# Altium PCB indicator.PcbDoc
Units mm, origin at the board's own origin, x right, y up, seen from the top; angles counter-clockwise.
Board outline 50.93 x 30.86 mm, 2 copper layers (Top Layer, Bottom Layer); 13 components, 10 nets, 28 pads, 0 vias.
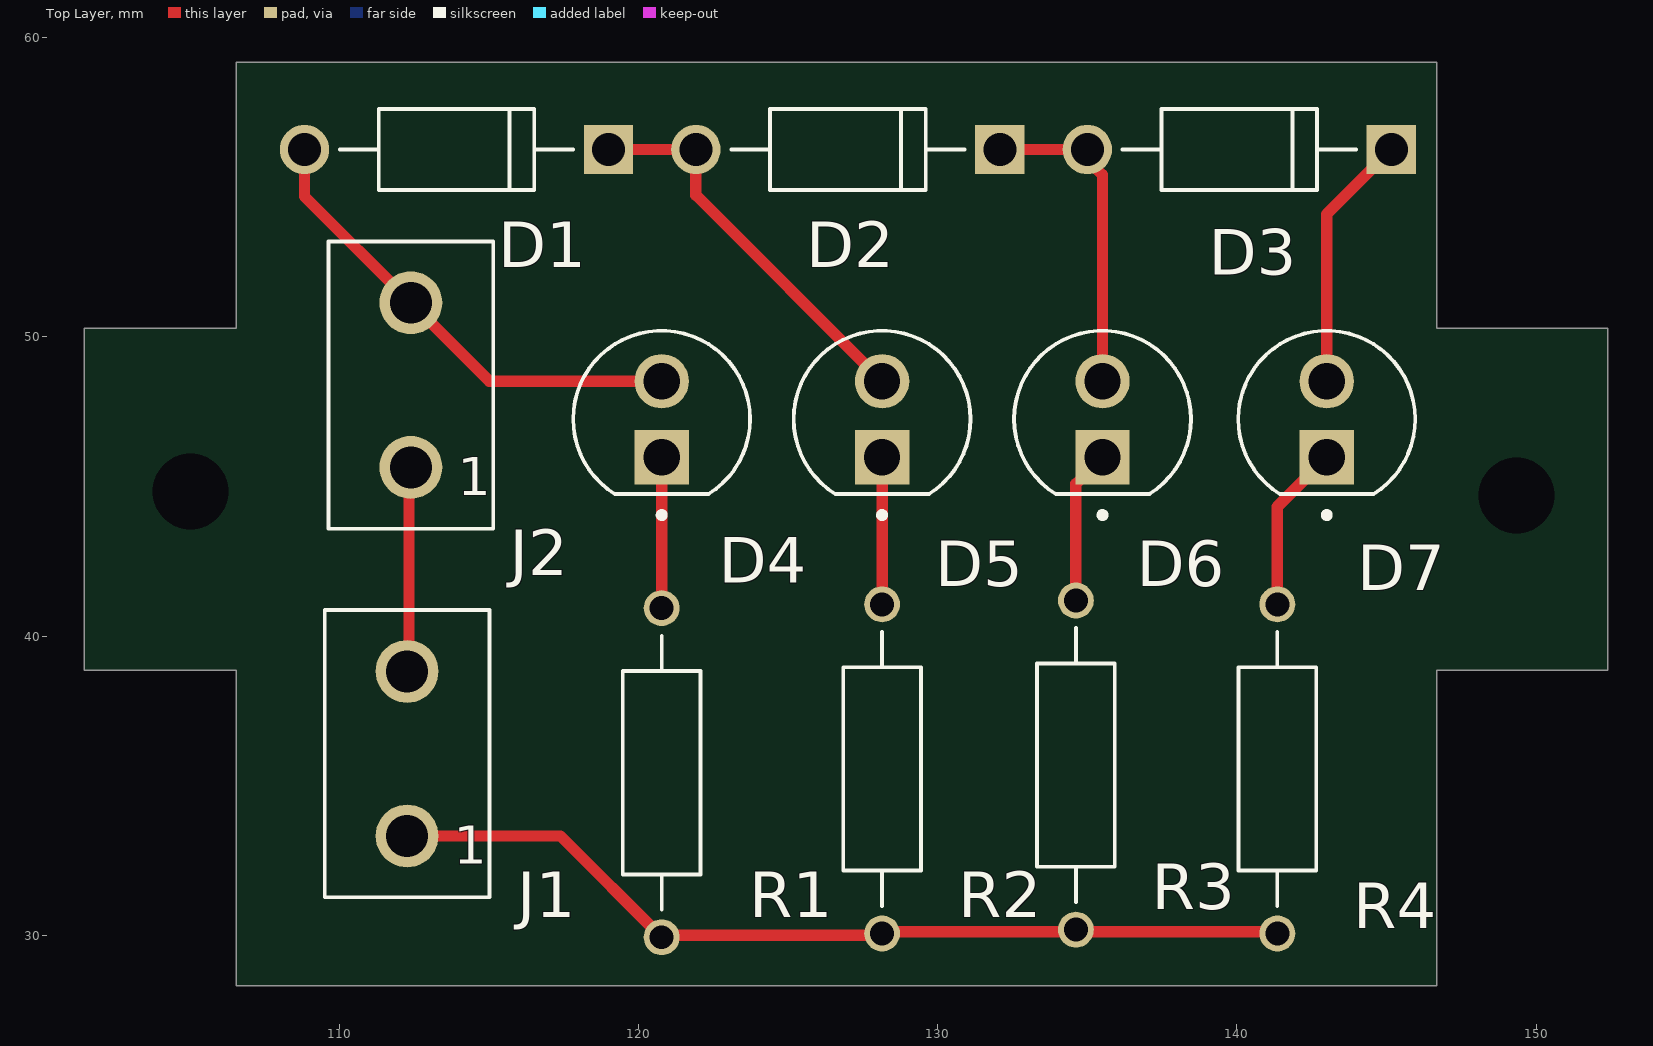
[diagram p0: Top Layer view]
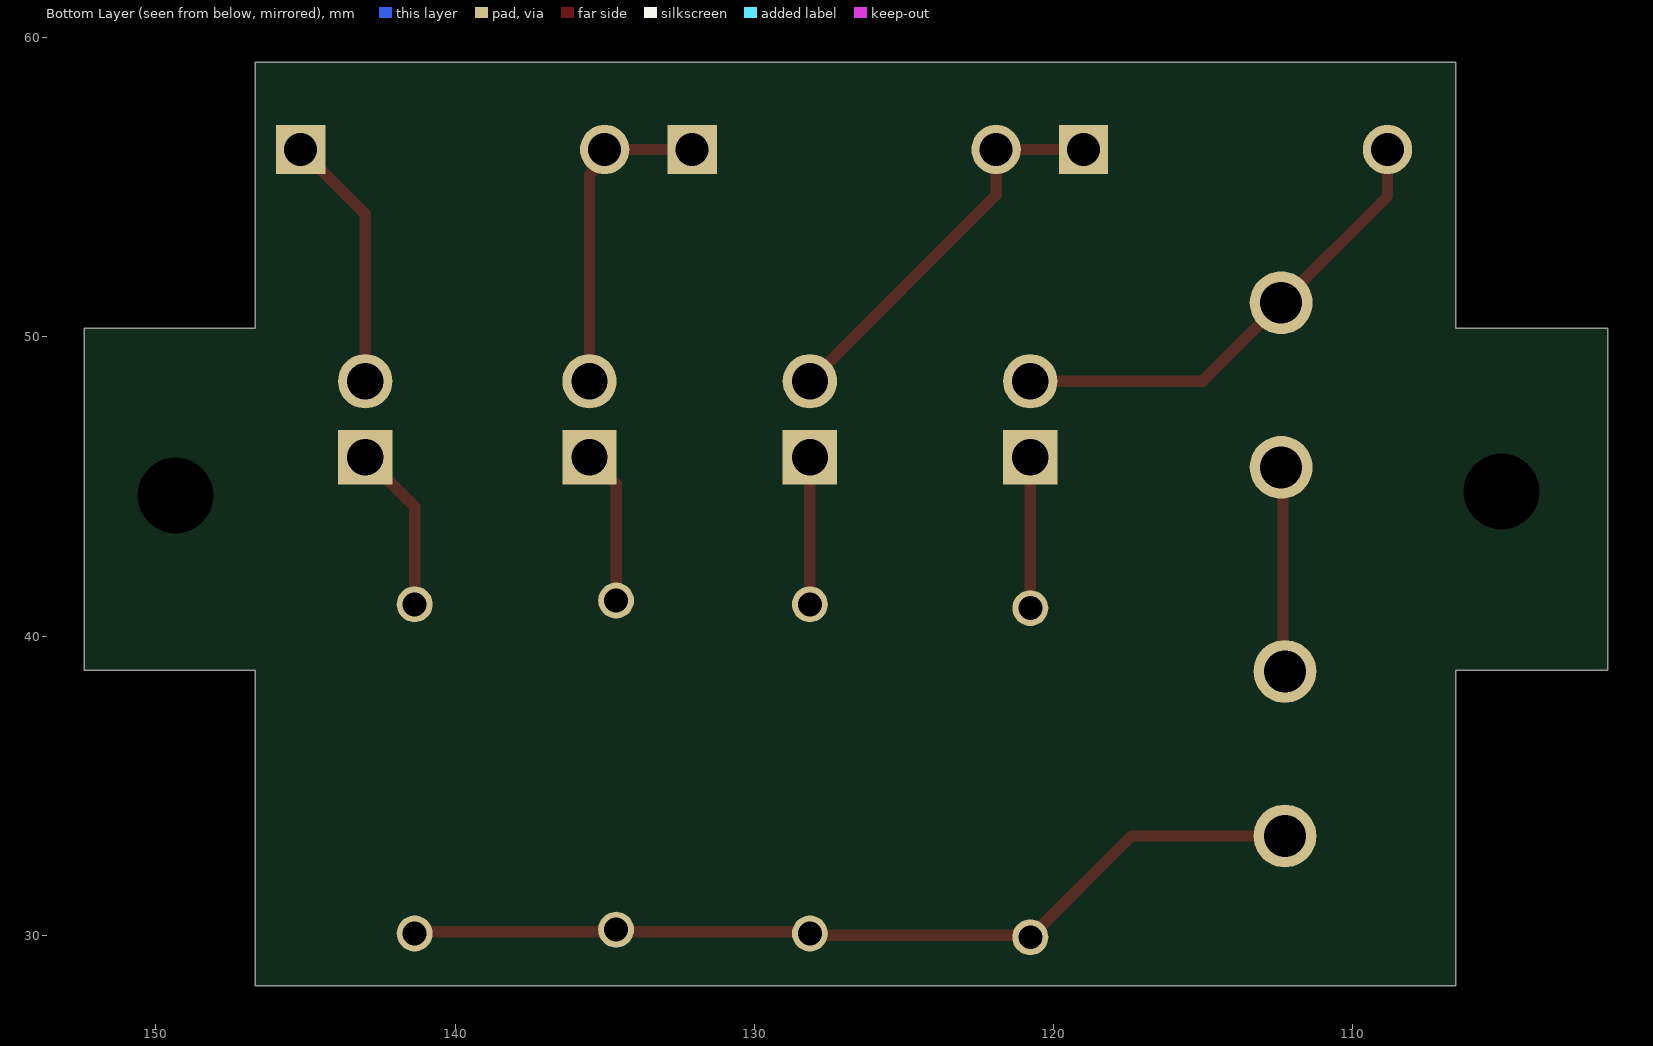
[diagram p1: Bottom Layer view, seen from below]
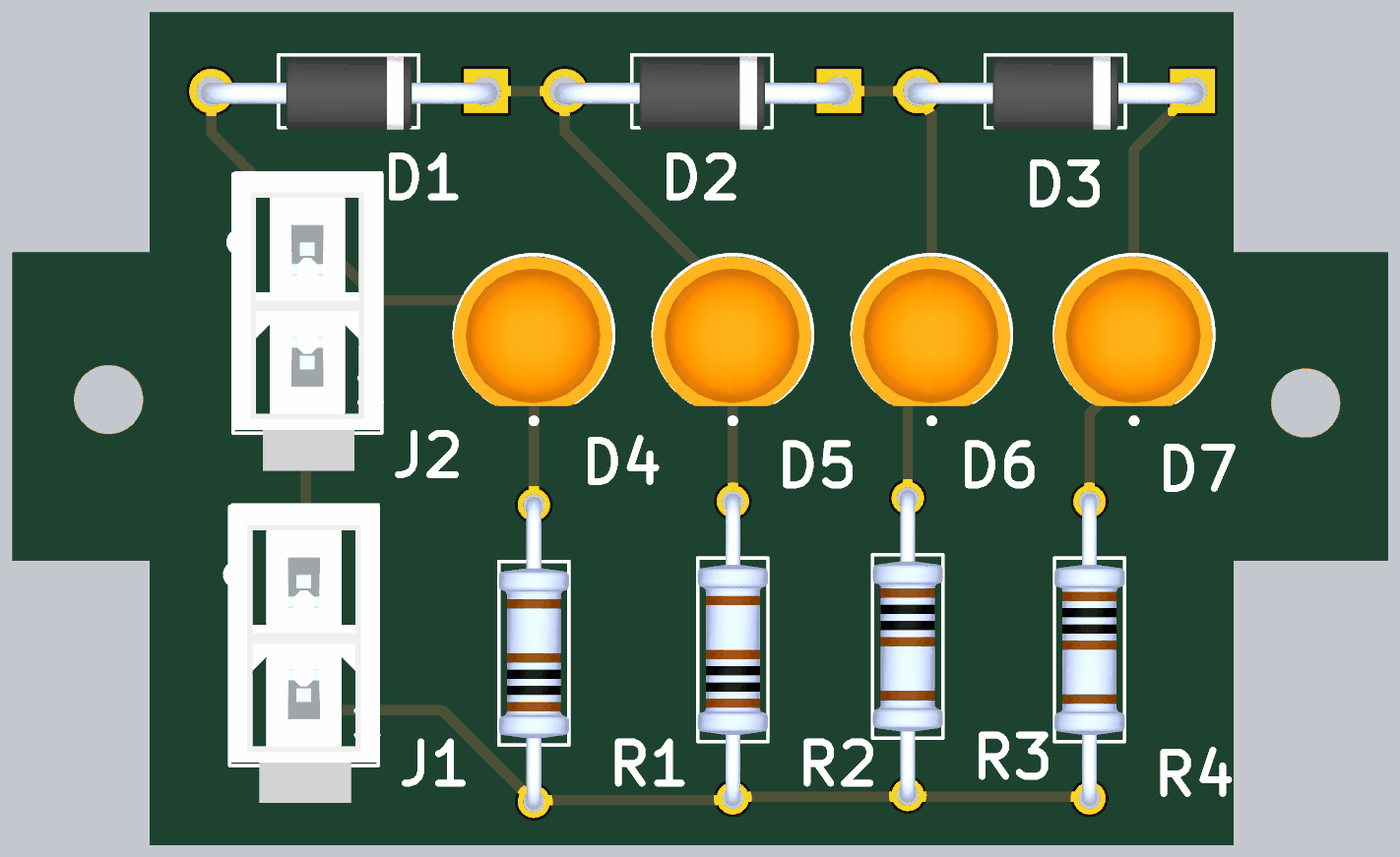
[diagram p2: 3D render of the assembled board from above, using the file's embedded part models]

## Layer stack, top to bottom
Top Solder: solder mask 0.0102, Solder Resist, Dk 3.5
Top Layer: signal copper 0.0356
Dielectric 1: dielectric 0.32, FR-4, Dk 4.8
Bottom Layer: signal copper 0.0356
Bottom Solder: solder mask 0.0102, Solder Resist, Dk 3.5

## Board outline
106.553,50.292 101.473,50.292 101.473,38.862 106.553,38.862 106.553,28.321 146.685,28.321 146.685,38.862 152.4,38.862 152.4,50.292 146.685,50.292 146.685,59.182 106.553,59.182

## Design rules (kind name [scope] priority, off if disabled: settings)
AssemblyTestPointUsage [All] p1 off:
AssemblyTestpoint [All] p1 off: testpointundercomponent=TRUE minsize=1.016 maxsize=2.54 preferedsize=1.524 minholesize=0 maxholesize=1.016 preferedholesize=0.813 testpointgrid=0.025 usegrid=TRUE gridtolerance=0 allowsidetop=TRUE allowsidebottom=TRUE
Clearance [All] p1: gap=0.381 ignorepadtopadclearanceinfootprint=FALSE except(0.508: Arc-Hole Track-Hole SMDPad-Hole THPad-Hole Via-Hole Fill-Hole Poly-Hole Region-Hole Text-Hole)
FabricationTestPointUsage [All] p1 off: valid=0 allowmultiple=FALSE
FabricationTestpoint [All] p1 off: side=3 testpointundercomponent=TRUE minsize=1.016 maxsize=2.54 preferedsize=1.524 minholesize=0 maxholesize=1.016 preferedholesize=0.813 testpointgrid=0.025 allowsidetop=TRUE allowsidebottom=TRUE usegrid=TRUE gridtolerance=0
PolygonConnect [All] p1: connectstyle=Relief reliefconductorwidth=0.254 reliefentries=4 polygonreliefangle="90 Angle" airgapwidth=0.254
RoutingVias [All] p1: holewidth=0.711 width=1.27 viastyle="Through Hole" minholewidth=0.711 minwidth=1.27 maxholewidth=0.711 maxwidth=1.27
SolderMaskExpansion [All] p1: expansion=0.102 istentingtop=FALSE
Width [All] p1: maxlimit=0.508 minlimit=0.254 preferedwidth=0.381
26 further rules are at their usual default settings.

## Components (designator, comment, footprint, x,y, rotation, side; value= is the part's Value field where it differs from the comment)
D1 "1N4007" DIOAD1060W80L520D270 113.919,56.261 r180 top
D2 "1N4007" DIOAD1060W80L520D270 127,56.261 r180 top
D3 "1N4007" DIOAD1060W80L520D270 140.081,56.261 r180 top
D4 "RED" LEDRD254W57D500H1070 120.777,47.244 r90 top
D5 "YELLOW" LEDRD254W57D500H1070 128.143,47.244 r90 top
D6 "YELLOW" LEDRD254W57D500H1070 135.509,47.244 r90 top
D7 "GREEN" LEDRD254W57D500H1070 143.002,47.244 r90 top
J1 "64900221122" 64900221122 112.268,36.068 r0 top
J2 "64900221122" 64900221122 112.395,48.387 r0 top
R1 "100" RESAD1100W55L680D260 120.777,35.433 r90 top
R2 "100" RESAD1100W55L680D260 128.143,35.56 r90 top
R3 "100" RESAD1100W55L680D260 134.62,35.687 r270 top
R4 "100" RESAD1100W55L680D260 141.351,35.56 r270 top

## Footprints (in the part's own frame and the unit in brackets; to place one, negate y for a bottom-side part, rotate by r counter-clockwise, add the part's x,y. Pads: shape width x height; smd on the part's side, far side on the other; paste and mask are expansions set on the pad)
64900221122 [mm]
  round 2.1 hole 1.4: 1(0,-2.75) 2(0,2.75)
  silkscreen extent -2.75,-4.8 2.75,4.8, body extent -3.01,-6.18 2.79,4.92, height 12.81
DIOAD1060W80L520D270 [mm]
  round 1.65 hole 1.1: A(5.08,0)
  rect 1.65x1.65 hole 1.1: C(-5.08,0)
  silkscreen extent -3.9,-1.35 3.9,1.35, body extent -5.49,-1.27 5.46,1.42, height 5.25
LEDRD254W57D500H1070 [mm]
  round 1.815 hole 1.21: A(1.27,0)
  rect 1.815x1.815 hole 1.21: C(-1.27,0)
  silkscreen extent -3.3,-2.96 2.96,2.96, body extent -2.65,-2.92 2.9,2.98, height 9.11
RESAD1100W55L680D260 [mm]
  round 1.2 hole 0.8: 1(-5.5,0) 2(5.5,0)
  silkscreen extent -4.58,-1.3 4.58,1.3, body extent -5.77,-1.3 5.77,1.3, height 2.6

## Part data
D1 D2 D3: "Diode Switching 1KV 1A 2-Pin DO-41", Package=None, Availability=Unavailable, MP=1N4007, Price=None
D4 D5 D6 D7: library part L08R5000Q1, "LED, Orange, Through Hole, T-1 3/4 (5mm), 30 mA, 2.1 V, 635 nm", Package=None, Availability=Unavailable, MP=L08R5000Q1, Price=None
J1 J2: "Connector Header Through Hole 2 position", Package=None, Availability=Unavailable, MF="Wurth Electronics", MP=64900221122, Price=None, SnapEDA_Link=https://www.snapeda.com/parts/64900221122/Wurth%20Electronics%20Inc./view-part/1276779/?ref=snap
R1 R2 R3: library part MFR-25FBF52-1K, "Through Hole Resistor Axial - Metal Film", Package="Axial Yageo", Availability="In Stock", Check_prices=https://www.snapeda.com/parts/MFR-25FBF52-1K/Yageo/view-part/?ref=eda, MF=Yageo, MP=MFR-25FBF52-1K, Price=None, Purchase-URL=https://pricing.snapeda.com/search/part/MFR-25FBF52-1K/?ref=eda, SnapEDA_Link=https://www.snapeda.com/parts/MFR-25FBF52-1K/Yageo/view-part/?ref=snap
R4: library part MFR-25FBF52-1K, "1.78 kOhms Â±1% 0.25W, 1/4W Through Hole Resistor Axial - Metal Film", Package="Axial Yageo", Availability="In Stock", Check_prices=https://www.snapeda.com/parts/MFR-25FBF52-1K/Yageo/view-part/?ref=eda, MF=Yageo, MP=MFR-25FBF52-1K, Price=None, Purchase-URL=https://pricing.snapeda.com/search/part/MFR-25FBF52-1K/?ref=eda, SnapEDA_Link=https://www.snapeda.com/parts/MFR-25FBF52-1K/Yageo/view-part/?ref=snap

## Free pads (board coordinates)
  round 1.65 hole 2.54: ""(105.029,44.831) ""(149.352,44.704)

## Nets (pads, with @x,y where several pads share a name; then routed paths per layer and width w, separated by ;. In a path a pad name is that pad's centre, name@x,y a point inside that pad or via, vN(x,y) a via of type N, cw(c..) or ccw(c..) an arc to the next point about the centre after c; other vN are vias at no path point)
NetD1_A: D1.A D4.A J2.2 | length 16.1
  Top Layer w0.381: D1.A 108.839,54.693 J2.2 115.018,48.514 D4.A
NetD1_C: D1.C D2.A D5.A | length 13.2
  Top Layer w0.381: D1.C D2.A 121.92,54.737 D5.A
NetD2_C: D2.C D3.A D6.A | length 10.9
  Top Layer w0.381: D2.C D3.A 135.001,55.918 135.509,55.41 D6.A
NetD3_C: D3.C D7.A | length 8.6
  Top Layer w0.381: D7.A 143.002,54.102 D3.C
NetD4_C: D4.C R1.2 | length 5.8
  Top Layer w0.381: D4.C@120.269,45.466 D4.C R1.2
NetD5_C: D5.C R2.2 | length 4.9
  Top Layer w0.381: R2.2 D5.C
NetD6_C: D6.C R3.1 | length 5.2
  Top Layer w0.381: R3.1 134.62,45.085 D6.C
NetD7_C: D7.C R4.1 | length 5.6
  Top Layer w0.381: R4.1 141.351,44.323 D7.C
NetJ1_1: J1.1 R1.1 R2.1 R3.2 R4.2 | length 30.8
  Top Layer w0.381: J1.1 117.392,33.318 R1.1 120.84,29.997 128.079,29.997 R2.1 128.207,30.124 134.556,30.124 R3.2 134.683,30.124 141.287,30.124 R4.2
  Bottom Layer w0.254: R2.1 R2.1@128.207,30.124 ; R3.2@134.556,30.124 R3.2
NetJ1_2: J1.2 J2.1 | length 6.9
  Top Layer w0.381: J1.2 112.331,38.881 112.331,45.574 J2.1

## Silkscreen, mask and mechanical layers (free items; w line width, h text height)
Top Component Outline:
  the board outline again, w0.125

## Text inside footprints (layer, text, board x,y; h text height)
J1: Top Overlay "1" at 113.833,32.393 h1.27; Mechanical 13 "1" at 113.833,32.393 h1.27; Mechanical 13 "2" at 113.833,38.273 h1.27
J2: Top Overlay "1" at 113.96,44.712 h1.27; Mechanical 13 "1" at 113.96,44.712 h1.27; Mechanical 13 "2" at 113.96,50.592 h1.27